# Altium PCB VOLTAGE_MEASURE_DC_V2.PcbDoc
Units mil, origin at the board's own origin, x right, y up, seen from the top; angles counter-clockwise.
Board outline 6000 x 4000 mil, 2 copper layers (Top Layer, Bottom Layer); 20 components, 15 nets, 72 pads, 0 vias.
Unrouted connection lines stored in the file: 38.
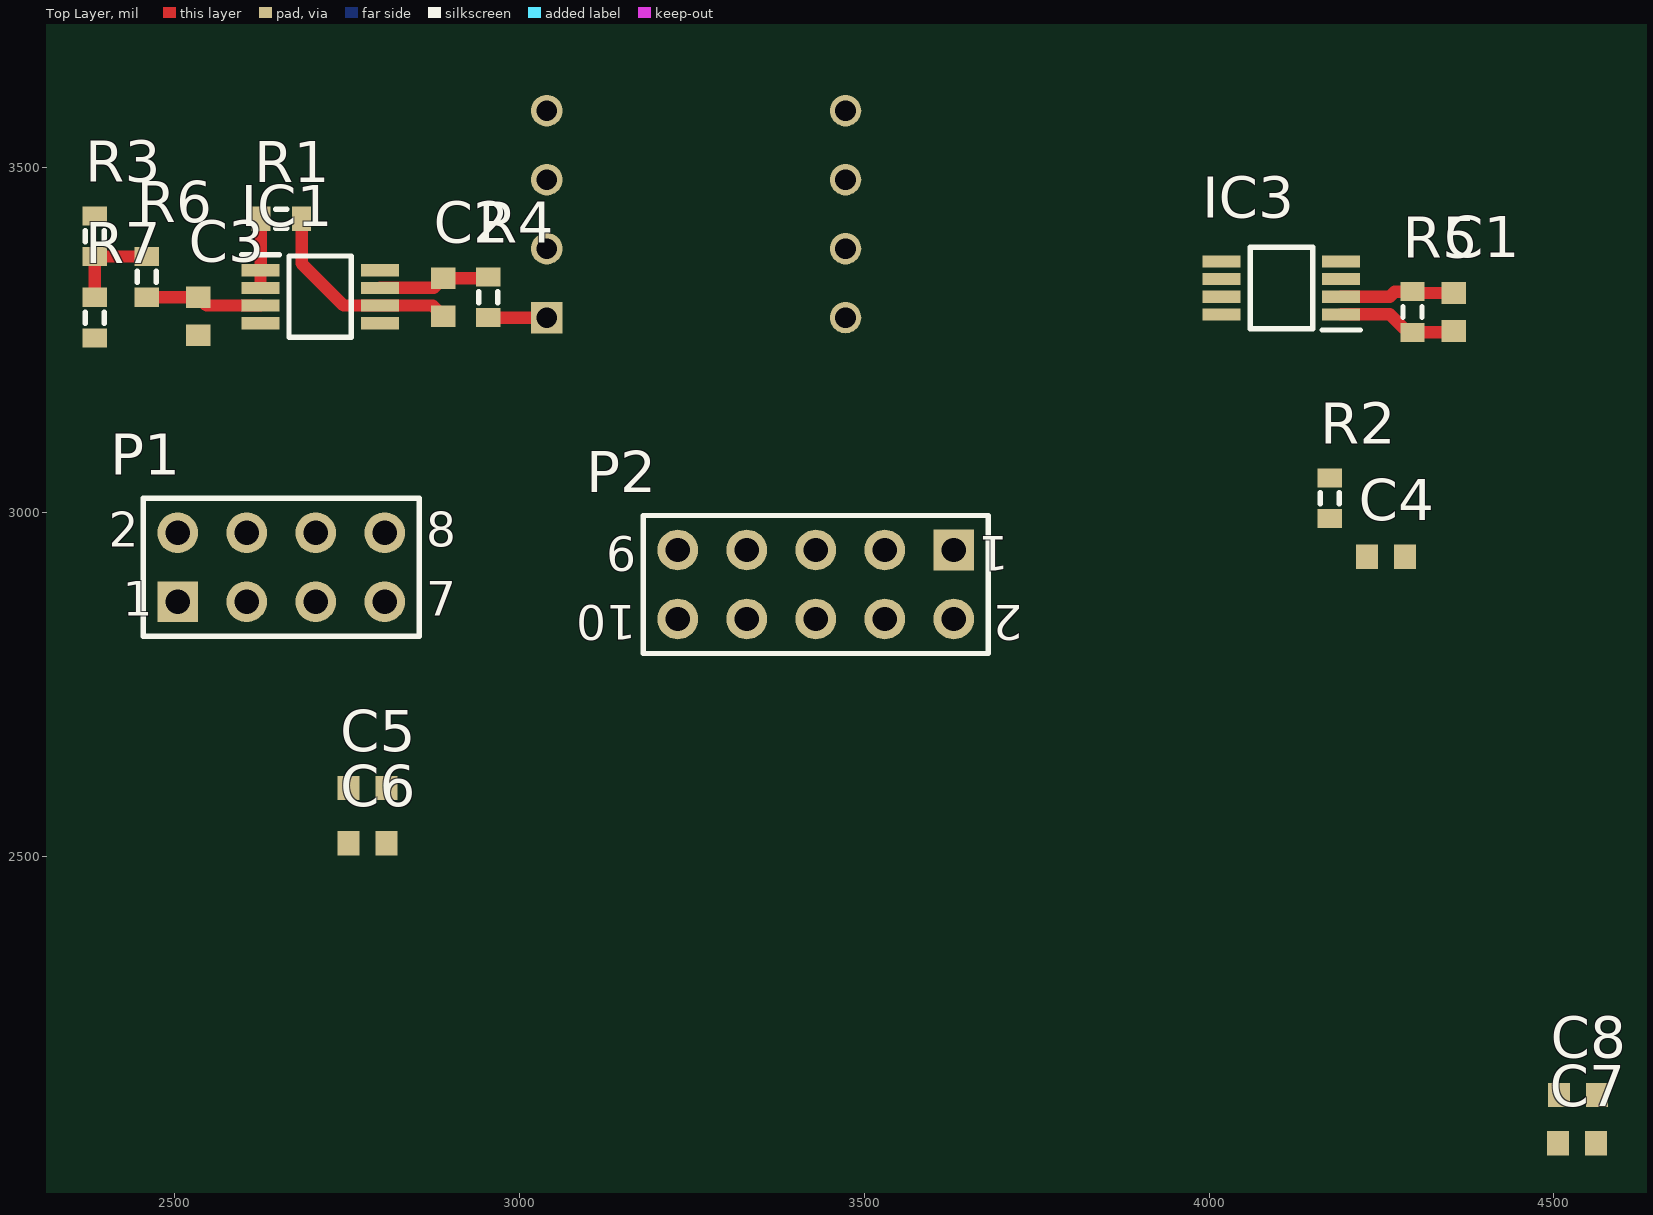
[diagram p0: Top Layer view]
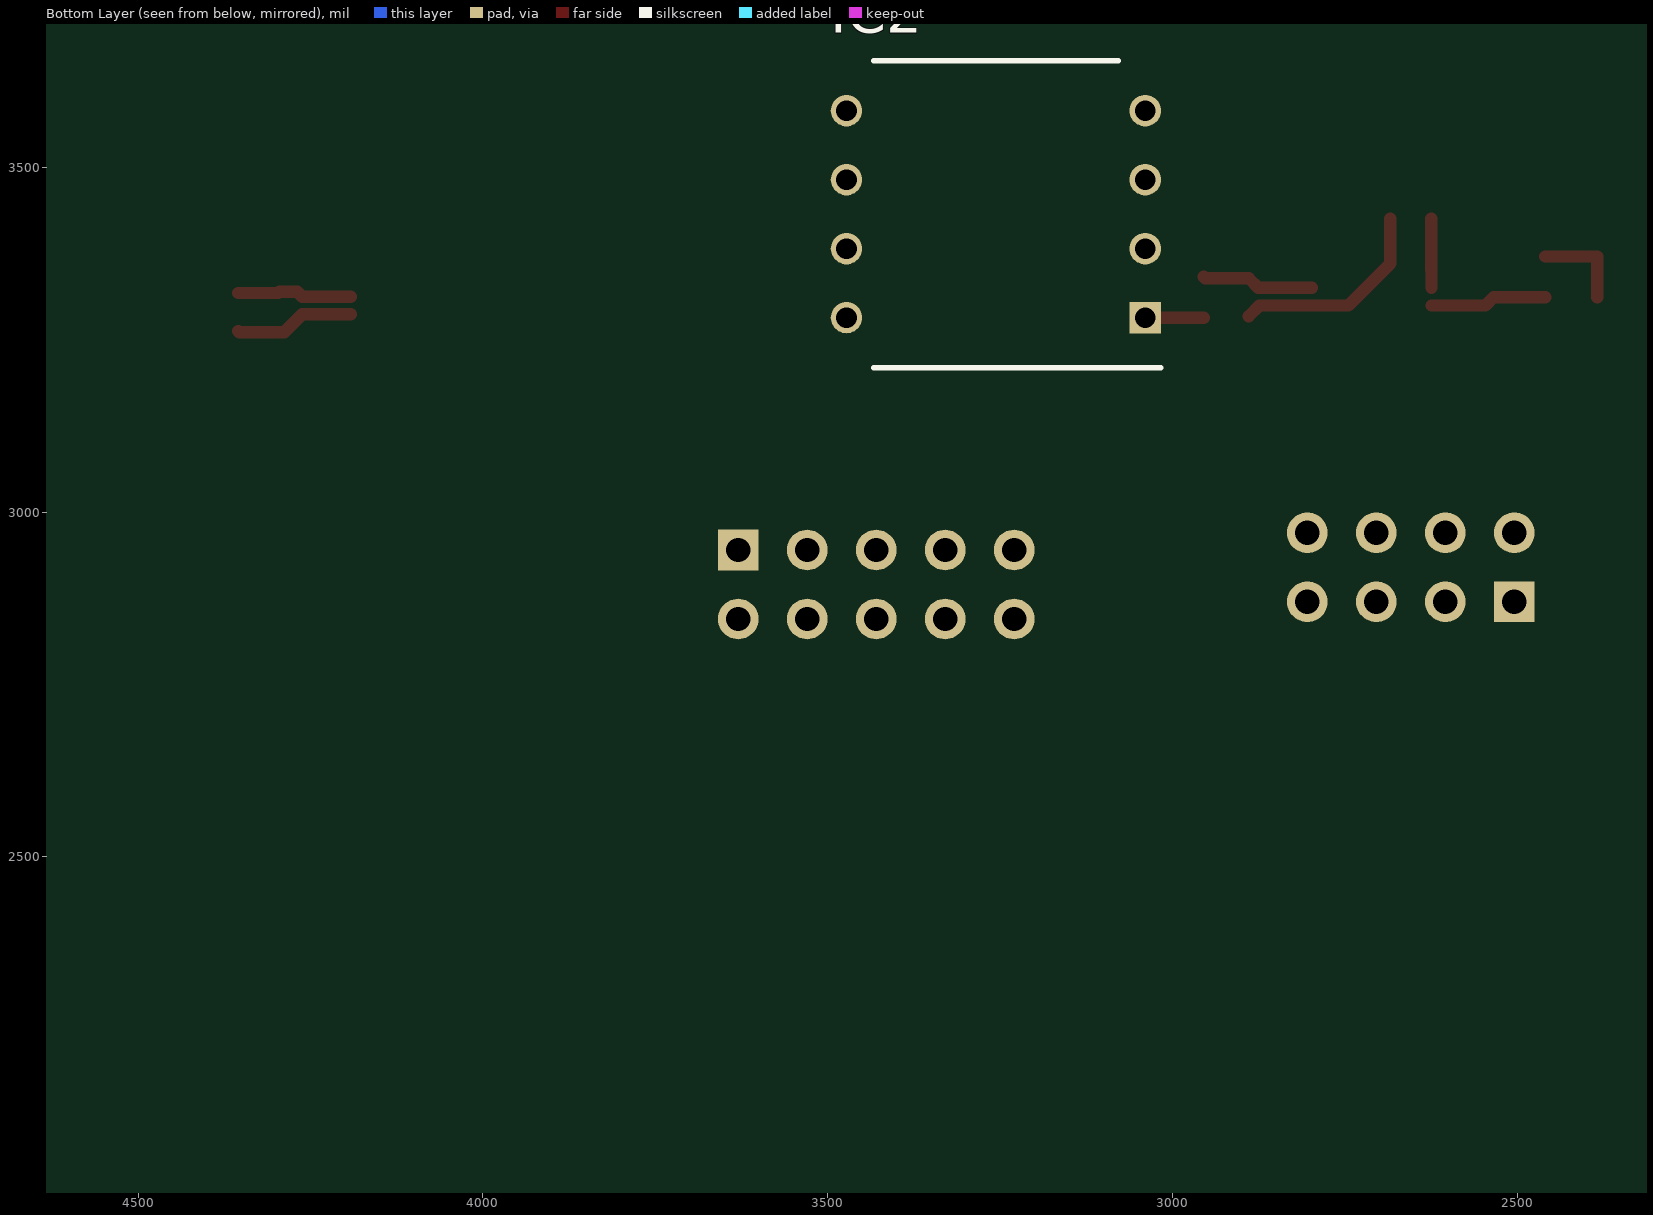
[diagram p1: Bottom Layer view, seen from below]

## Layer stack, top to bottom
Top Solder: solder mask 0.4, Solder Resist, Dk 3.5
Top Layer: signal copper 1.4
Dielectric 1: dielectric 12.6, FR-4, Dk 4.8
Bottom Layer: signal copper 1.4
Bottom Solder: solder mask 0.4, Solder Resist, Dk 3.5

## Board outline
1000,1000 7000,1000 7000,5000 1000,5000

## Design rules (kind name [scope] priority, off if disabled: settings)
Clearance [All] p1: gap=10 ignorepadtopadclearanceinfootprint=FALSE except(0: Arc-Arc Arc-Track Arc-SMDPad Arc-Hole Track-Track Track-SMDPad Track-Hole SMDPad-SMDPad SMDPad-Hole THPad-Hole Via-Hole Fill-Hole Poly-Hole Region-Hole Text-Hole)
PolygonConnect [All] p1: connectstyle=Relief reliefconductorwidth=10 reliefentries=4 polygonreliefangle="90 Angle" airgapwidth=10
RoomDefinition VOLTAGE_MEASURE_DC_V2 [InComponentClass('VOLTAGE_MEASURE_DC_V2')] p1: confinementstyle=ConfineIn formatcopy=TRUE lockcomponents=FALSE outline 1711.54,1295 5676.54,1295 5676.54,4385 1711.54,4385
RoutingVias [All] p1: holewidth=28 width=50 viastyle="Through Hole" minholewidth=28 minwidth=50 maxholewidth=28 maxwidth=50
SolderMaskExpansion [All] p1: expansion=4
Width [All] p1: maxlimit=50 minlimit=10 preferedwidth=18 bottomlayer_maxwidth=10 bottomlayer_prefwidth=10 minimp=50.000000 maximp=50.000000 favimp=50.000000
30 further rules are at their usual default settings.

## Components (designator, comment, footprint, x,y, rotation, side; value= is the part's Value field where it differs from the comment)
C1 "Cap" 1608[0603] 4355,3290 r270 top value=10pF
C2 "Cap" 1608[0603] 2890,3311.42 r270 top value=10pF
C3 "Cap" 1608[0603] 2535,3283.86 r90 top value=10nF
C4 "Cap" 1608[0603] 4256.54,2935 r0 top value=10nF
C5 "Cap" 1608[0603] 2780,2600 r0 top value=10uF
C6 "Cap" 1608[0603] 2780,2520 r0 top value=10nF
C7 "Cap" 1608[0603] 4533.46,2085 r180 top value=10uF
C8 "Cap" 1608[0603] 4535,2155 r180 top value=10nF
IC1 "OPA2188AIDGKT" SOP65P490X110-8N 2711.61,3312.2 r0 top
IC2 "HCNR200-000E" DIP1100W56P254L1115H510Q8N 3256.54,3431.89 r0 bottom
IC3 "OPA2188AIDGKT" SOP65P490X110-8N 4105,3325 r180 top
P1 "Header 4X2" HDR2X4 2505,2870 r0 top
P2 "Header 5X2" HDR2X5 3630,2945 r180 top
R1 "Res1" J1-0603 2655,3425 r180 top value=80K
R2 "Res1" J1-0603 4175,3020 r270 top value=10K
R3 "Res1" J1-0603 2385,3400 r90 top value=10K
R4 "Res1" J1-0603 2955,3311.42 r270 top value=200
R5 "Res1" J1-0603 4295,3290 r90 top value=80K
R6 "Res1" J1-0603 2460,3340.94 r90 top value=10K
R7 "Res1" J1-0603 2385,3281.89 r90 top value=10K

## Footprints (in the part's own frame and the unit in brackets; to place one, negate y for a bottom-side part, rotate by r counter-clockwise, add the part's x,y. Pads: shape width x height; smd on the part's side, far side on the other; paste and mask are expansions set on the pad)
1608[0603] [mm] "Chip Capacitor, Body 1.6x0.8mm, IPC High Density"
  rect 0.8x0.9 smd: 1(-0.7,0) 2(0.7,0)
  body extent -0.87,-0.48 0.87,0.48, height 1.3
DIP1100W56P254L1115H510Q8N [mm]
  rect 1.16x1.16 hole 0.76: 1(-5.5,3.81)
  round 1.16 hole 0.76: 2(-5.5,1.27) 3(-5.5,-1.27) 4(-5.5,-3.81) 5(5.5,-3.81) 6(5.5,-1.27) 7(5.5,1.27) 8(5.5,3.81)
  silkscreen extent -6.08,-5.65 4.5,5.65, body extent -5.64,-5.58 5.64,5.57, height 5.1
HDR2X4 [mm] "Connector; Header; 4x2 Position"
  rect 1.5x1.5 hole 0.9: 1(0,0)
  round 1.5 hole 0.9: 2(0,2.54) 3(2.54,0) 4(2.54,2.54) 5(5.08,0) 6(5.08,2.54) 7(7.62,0) 8(7.62,2.54)
  silkscreen extent -1.27,-1.27 8.89,3.81
HDR2X5 [mm] "Connector; Header; 5x2 Position"
  rect 1.5x1.5 hole 0.9: 1(0,0)
  round 1.5 hole 0.9: 2(0,2.54) 3(2.54,0) 4(2.54,2.54) 5(5.08,0) 6(5.08,2.54) 7(7.62,0) 8(7.62,2.54) 9(10.16,0) 10(10.16,2.54)
  silkscreen extent -1.27,-1.27 11.43,3.81
J1-0603 [mm] "Chip Resistor, Body 1.6x0.8mm, IPC High Density"
  rect 0.7x0.9 smd: 1(-0.75,0) 2(0.75,0)
  silkscreen extent -0.2,-0.35 0.2,0.35, body extent -0.85,-0.48 0.85,0.48, height 0.9
SOP65P490X110-8N [mm]
  rect 1.4x0.45 smd: 1(-2.2,0.975) 2(-2.2,0.325) 3(-2.2,-0.325) 4(-2.2,-0.975) 5(2.2,-0.975) 6(2.2,-0.325) 7(2.2,0.325) 8(2.2,0.975)
  silkscreen extent -2.9,-1.5 1.15,1.55, body extent -2.45,-1.5 2.45,1.5, height 1.1

## Part data
C1 C2 C3 C4 C5 C6 C7 C8: "Capacitor", LatestRevisionDate=17-Jul-2002, LatestRevisionNote="Re-released for DXP Platform.", PackageDescription="Radial Cap, Thru-Hole; 2 Leads; 0.3 in Pin Spacing", PackageReference=RAD-0.3, Published=8-Jun-2000, Publisher="Altium Limited"
IC1 IC3: "Integrated Circuit", Manufacturer_Name="Texas Instruments", Mouser Part Number=595-OPA2188AIDGKT, RS Part Number=8122561P, Datasheet Link=http://www.ti.com/lit/ds/symlink/opa2188.pdf, Height=1.1mm, Manufacturer_Part_Number=OPA2188AIDGKT, Mouser Price/Stock=https://www.mouser.com/Search/Refine.aspx?Keyword=595-OPA2188AIDGKT, RS Price/Stock=http://uk.rs-online.com/web/p/products/8122561P
IC2: "Integrated Circuit", Manufacturer_Name="Avago Technologies", Mouser Part Number=630-HCNR200-000E, RS Part Number=6961248P, Datasheet Link=https://docs.broadcom.com/docs/AV02-0886EN, Height=5.1mm, Manufacturer_Part_Number=HCNR200-000E, Mouser Price/Stock=https://www.mouser.com/Search/Refine.aspx?Keyword=630-HCNR200-000E, RS Price/Stock=http://uk.rs-online.com/web/p/products/6961248P
P1: "Header, 4-Pin, Dual row", LatestRevisionDate=17-Jul-2002, LatestRevisionNote="Re-released for DXP Platform.", Publisher="Altium Limited"
P2: "Header, 5-Pin, Dual row", LatestRevisionDate=17-Jul-2002, LatestRevisionNote="Re-released for DXP Platform.", Publisher="Altium Limited"
R1 R2 R3 R4 R5 R6 R7: "Resistor", LatestRevisionDate=17-Jul-2002, LatestRevisionNote="Re-released for DXP Platform.", PackageDescription="Axial Device, Thru-Hole; 2 Leads; 0.3 in Pin Spacing", PackageReference=AXIAL-0.3, Published=8-Jun-2000, Publisher="Altium Limited"

## Nets (pads, with @x,y where several pads share a name; then routed paths per layer and width w, separated by ;. In a path a pad name is that pad's centre, name@x,y a point inside that pad or via, vN(x,y) a via of type N, cw(c..) or ccw(c..) an arc to the next point about the centre after c; other vN are vias at no path point)
GND: C4.1 C7.2 C8.2 IC2.5 IC3.3 IC3.4 P2.3 P2.4 P2.9 P2.10
NetC1_1: C1.1 IC2.6 IC3.2 R5.2 | length 167.2
  Top Layer w18: IC3.2 4262.2,3312.2 4269.53,3319.53 R5.2 4296.97,3317.56 C1.1
NetC1_2: C1.2 IC3.1 R2.1 R5.1 | length 175
  Top Layer w18: IC3.1 4262.2,3286.61 4288.35,3260.47 R5.1 4353.03,3260.47 C1.2
NetC2_1: C2.1 IC1.7 R4.1 | length 163.4
  Top Layer w18: IC1.7 2876.02,3325 C2.1 2953.03,3338.98 R4.1
NetC2_2: C2.2 IC1.6 IC2.3 R1.1 | length 301.7
  Top Layer w18: R1.1 2684.53,3360.47 2745.59,3299.41 IC1.6 2874.45,3299.41 C2.2
NetC3_2: C3.2 IC1.3 R6.1 | length 170
  Top Layer w18: R6.1 C3.2 2547.01,3299.41 IC1.3
NetC4_2: C4.2 IC3.5 R2.2
NetIC1_1: IC1.1 IC1.2 R1.2 | length 100.2
  Top Layer w18: IC1.2 IC1.1 2625.47,3351.06 R1.2
NetIC2_1: IC2.1 R4.2 | length 85
  Top Layer w18: R4.2 IC2.1
NetR3_1: R3.1 R6.2 R7.2 | length 134.1
  Top Layer w18: R7.2 R3.1 R6.2
PGND: C3.1 C5.2 C6.2 IC1.4 IC1.5 IC2.4 P1.3 P1.4 P1.7 P1.8 R7.1
PVCC: C5.1 C6.1 IC1.8 IC2.2 P1.5 P1.6
VCC: C7.1 C8.1 IC3.8 P2.1 P2.2
VIN: P1.1 P1.2 R3.2
VOUT: IC3.6 IC3.7 P2.7 P2.8
pads on no net: IC2.7 IC2.8 P2.5 P2.6

## Text inside footprints (layer, text, board x,y; h text height)
P1: Top Overlay "2" at 2405,2950 h50; Top Overlay "1" at 2425,2850 h50; Top Overlay "7" at 2865,2850 h50; Top Overlay "8" at 2865,2950 h50
P2: Top Overlay "10" at 3170,2865 h50 r180; Top Overlay "9" at 3170,2965 h50 r180; Top Overlay "1" at 3710,2965 h50 r180; Top Overlay "2" at 3730,2865 h50 r180